# Altium PCB test.PcbDoc
Units mm, origin at the board's own origin, x right, y up, seen from the top; angles counter-clockwise.
Board outline 29.72 x 23.62 mm, 2 copper layers (Top Layer, Bottom Layer); 13 components, 30 nets, 72 pads, 6 vias.
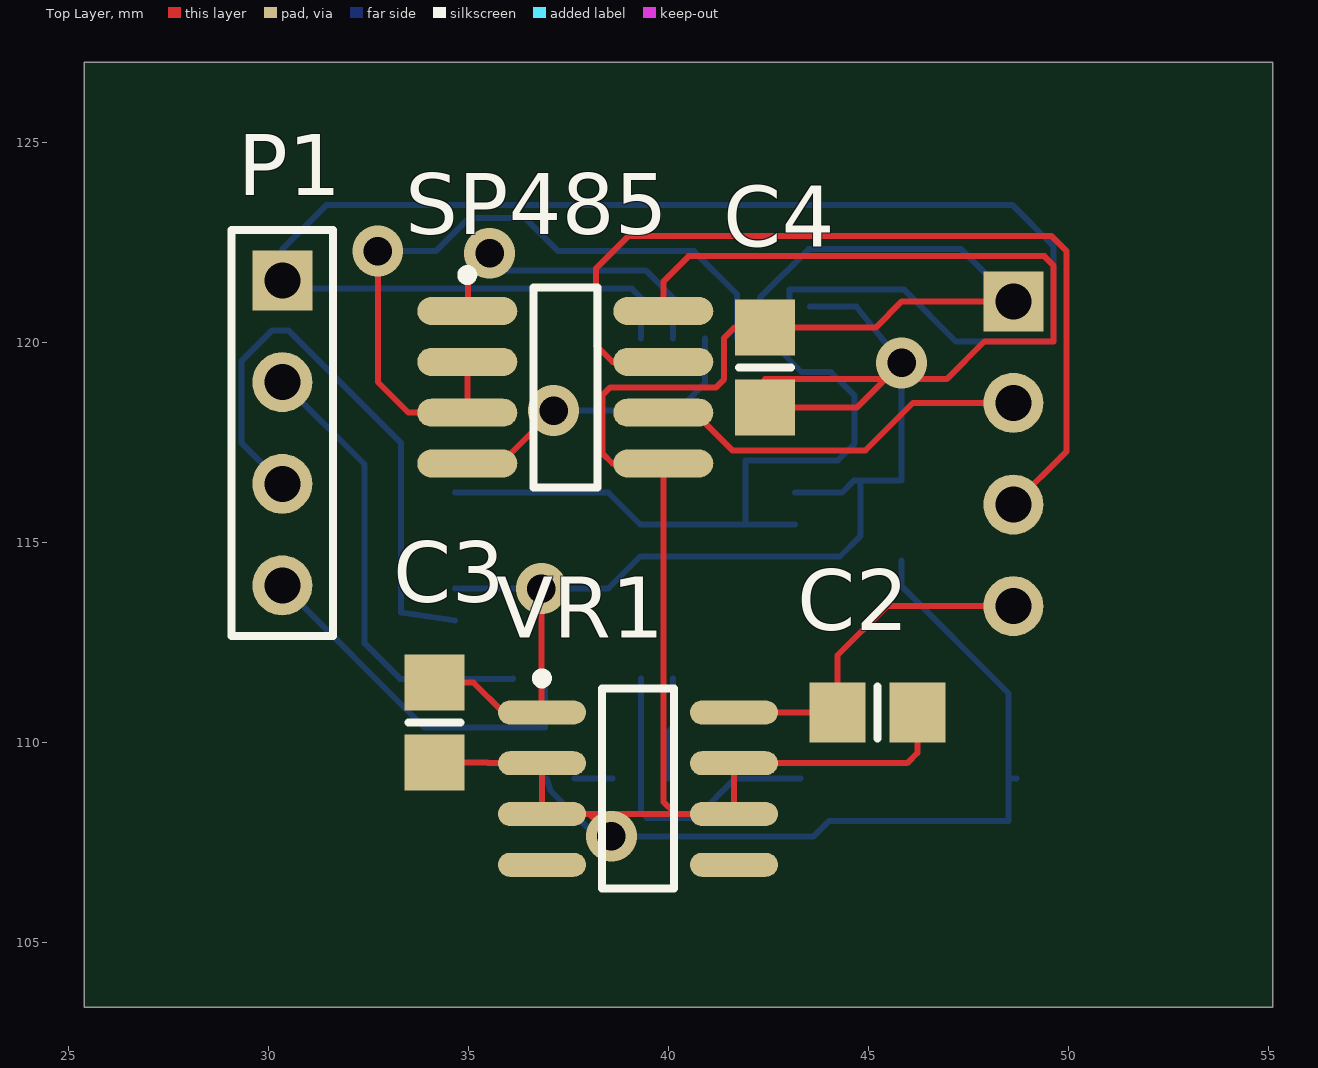
[diagram p0: Top Layer view]
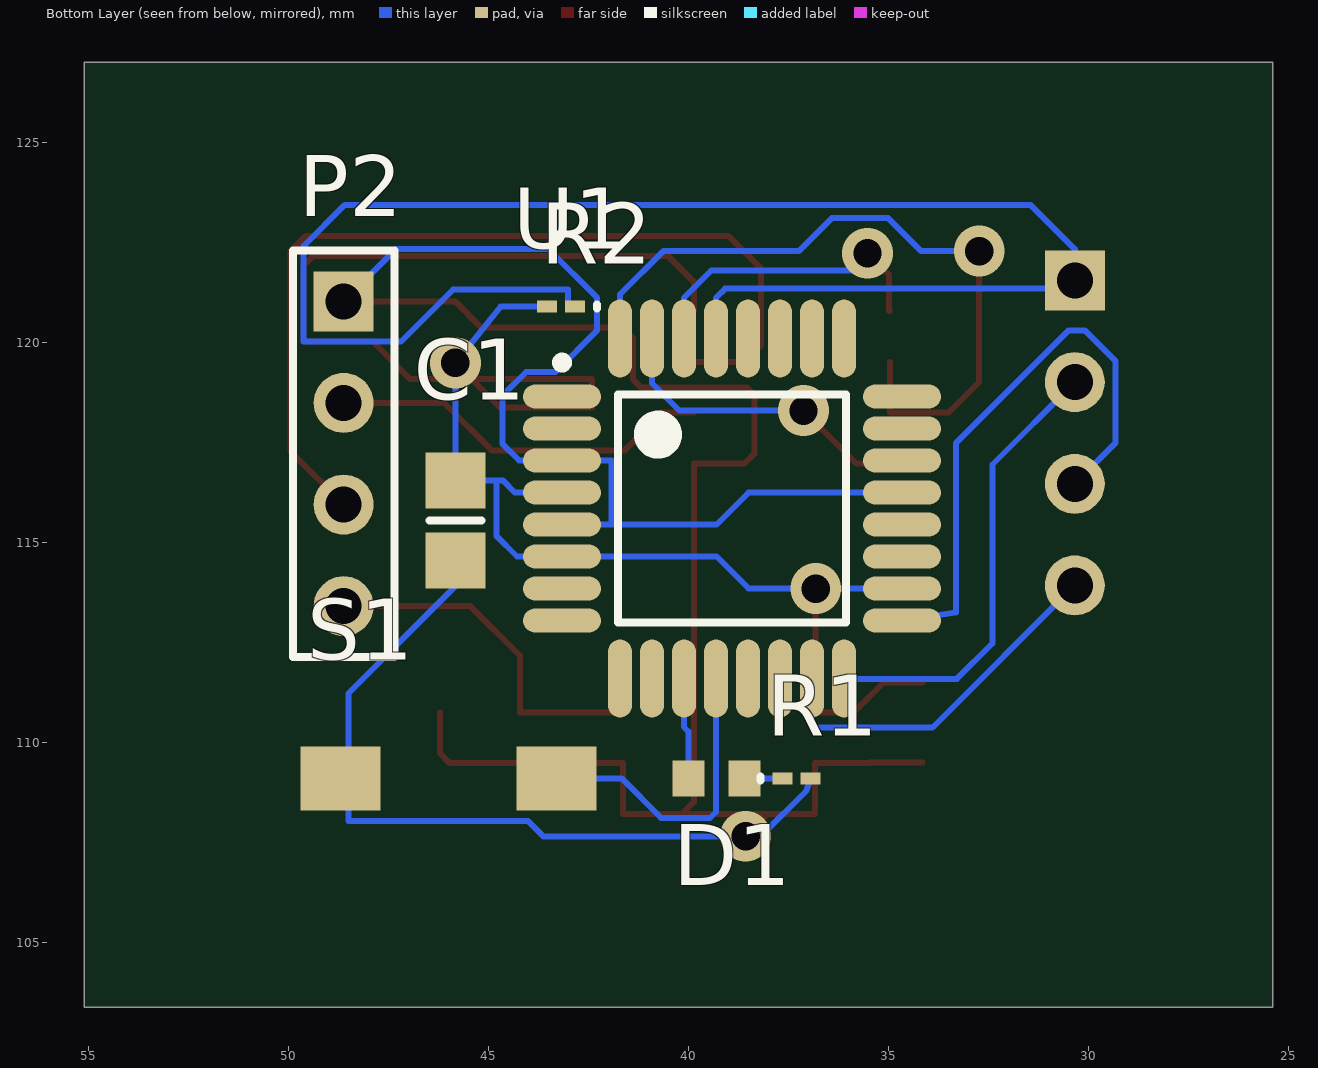
[diagram p1: Bottom Layer view, seen from below]

## Layer stack, top to bottom
Top Solder: solder mask 0.0102, Solder Resist, Dk 3.5
Top Layer: signal copper 0.0356
Dielectric 1: dielectric 0.32, FR-4, Dk 4.8
Bottom Layer: signal copper 0.0356
Bottom Solder: solder mask 0.0102, Solder Resist, Dk 3.5

## Board outline
25.4,103.378 55.118,103.378 55.118,127 25.4,127

## Design rules (kind name [scope] priority, off if disabled: settings)
Clearance [All] p1: gap=0.175
PolygonConnect [All] p1: connectstyle=Relief reliefconductorwidth=0.254 reliefentries=4 polygonreliefangle="90 Angle" airgapwidth=0.254
RoomDefinition U_sensor_specific [InComponentClass('U_sensor_specific')] p1: confinementstyle=ConfineIn formatcopy=TRUE lockcomponents=FALSE outline 25.389,103.367 56.377,103.367 56.377,126.989 25.389,126.989
RoomDefinition U_general_Interface [InComponentClass('U_general_Interface')] p2: confinementstyle=ConfineIn formatcopy=TRUE lockcomponents=FALSE outline 25.273,103.505 56.769,103.505 56.769,127.127 25.273,127.127
RoutingVias [All] p1: holewidth=0.711 width=1.27 viastyle="Through Hole" minholewidth=0.711 minwidth=1.27 maxholewidth=0.711 maxwidth=1.27
SolderMaskExpansion [All] p1: expansion=0.102
Width [All] p1: maxlimit=0.254 minlimit=0.15 preferedwidth=0.15
30 further rules are at their usual default settings.

## Classes and differential pairs
component class U_sensor_specific: P1 P2
component class U_general_Interface: C1 C2 C3 C4 D1 R1 R2 S1 SP485 U1 VR1

## Components (designator, comment, footprint, x,y, rotation, side; value= is the part's Value field where it differs from the comment)
C1 "" 6-0805_M 45.836,115.543 r270 bottom
C2 "Cap2" 6-0805_M 45.228,110.744 r0 top
C3 "Cap2" 6-0805_M 34.163,110.49 r270 top
C4 "Cap2" 6-0805_M 42.418,119.364 r90 top
D1 "LED0" 1608[0603] 39.308,109.093 r180 bottom
P1 "Header 4" HDR1X4 30.353,121.539 r270 top
P2 "Header 4" HDR1X4 48.63,121.02 r270 bottom
R1 "Res1" 0603 37.307,109.093 r180 bottom
R2 "" 0603 43.2,120.893 r0 bottom
S1 "SW-PB" ADTSM3 42.207,109.993 r0 bottom
SP485 "SP485" SO8_M 37.428,118.872 r0 top
U1 "ATmega328P-AU" 32A_M 38.921,115.84 r180 bottom
VR1 "L78L05ACD" SO8_N 39.243,108.839 r0 top

## Footprints (in the part's own frame and the unit in brackets; to place one, negate y for a bottom-side part, rotate by r counter-clockwise, add the part's x,y. Pads: shape width x height; smd on the part's side, far side on the other; paste and mask are expansions set on the pad)
6-0805_M [mm] "Chip Resistor, Body 2.0x1.2mm, IPC Low Density"
  rect 1.4x1.5 smd: 1(-1,0) 2(1,0)
  silkscreen extent 0,-0.65 0,0.65, body extent -1.07,-0.7 1.07,0.7, height 0.7
32A_M [mm] "Thin QFP, 32-Leads, Body 7x7mm, Pitch 0.8mm, IPC Low Density"
  oval 1.95x0.6 smd: 1(-4.25,2.8) 2(-4.25,2) 3(-4.25,1.2) 4(-4.25,0.4) 5(-4.25,-0.4) 6(-4.25,-1.2) 7(-4.25,-2) 8(-4.25,-2.8) 17(4.25,-2.8) 18(4.25,-2) 19(4.25,-1.2) 20(4.25,-0.4) 21(4.25,0.4) 22(4.25,1.2) 23(4.25,2) 24(4.25,2.8)
  oval 0.6x1.95 smd: 9(-2.8,-4.25) 10(-2,-4.25) 11(-1.2,-4.25) 12(-0.4,-4.25) 13(0.4,-4.25) 14(1.2,-4.25) 15(2,-4.25) 16(2.8,-4.25) 25(2.8,4.25) 26(2,4.25) 27(1.2,4.25) 28(0.4,4.25) 29(-0.4,4.25) 30(-1.2,4.25) 31(-2,4.25) 32(-2.8,4.25)
  silkscreen extent -4.38,-2.85 2.85,3.77, body extent -3.5,-3.5 3.5,3.5, height 1.2
0603 [mm] "Chip Inductor, Body 0.6x0.3mm, IPC High Density"
  rect 0.5x0.3 smd: 1(-0.35,0) 2(0.35,0)
  silkscreen extent -0.9,-0.05 -0.9,0.05, body extent -0.33,-0.18 0.33,0.18, height 0.55
1608[0603] [mm] "Chip Capacitor, Body 1.6x0.8mm, IPC High Density"
  rect 0.8x0.9 smd: 1(-0.7,0) 2(0.7,0)
  body extent -0.87,-0.48 0.87,0.48, height 1.3
ADTSM3 [mm]
  rect 2x1.6 smd: 1(1.1,0.9) 2(6.5,0.9)
  body extent 1,-1.3 6.6,3.1, height 4
HDR1X4 [mm] "Connector; Header; 4 Position"
  rect 1.5x1.5 hole 0.9: 1(0,0)
  round 1.5 hole 0.9: 2(2.54,0) 3(5.08,0) 4(7.62,0)
  silkscreen extent -1.27,-1.27 8.89,1.27
SO8_M [mm] "SOIC, 8-Leads, Body 4.9x3.9mm, Pitch 1.27mm, IPC Low Density"
  oval 2.5x0.7 smd: 1(-2.45,1.905) 2(-2.45,0.635) 3(-2.45,-0.635) 4(-2.45,-1.905) 5(2.45,-1.905) 6(2.45,-0.635) 7(2.45,0.635) 8(2.45,1.905)
  silkscreen extent -2.57,-2.5 0.8,2.93, body extent -2,-2.5 2,2.5, height 1.75
SO8_N [mm] "SOIC, 8-Leads, Body 4.9x3.9mm, Pitch 1.27mm, IPC Medium Density"
  oval 2.2x0.6 smd: 1(-2.4,1.905) 2(-2.4,0.635) 3(-2.4,-0.635) 4(-2.4,-1.905) 5(2.4,-1.905) 6(2.4,-0.635) 7(2.4,0.635) 8(2.4,1.905)
  silkscreen extent -2.52,-2.5 0.9,2.88, body extent -1.95,-2.45 1.95,2.45, height 1.75

## Part data
C1: library part Cap2, "Capacitor"
C2 C3 C4: "Capacitor"
D1: "Typical INFRARED GaAs LED"
P1 P2: "Header, 4-Pin"
R1: "Resistor"
R2: library part Res1, "Resistor"
S1: "Switch"
SP485: "SN75176"
U1: "8-bit AVR Microcontroller, 32KB Flash, 1KB EEPROM, 2KB SRAM, 32-pin TQFP, Industrial Grade (-40°C to 85°C)"
VR1: "Positive Voltage Regulator"

## Via types
v1: diameter 1.27, hole 0.711, Top Layer to Bottom Layer, 6 vias

## Nets (pads, with @x,y where several pads share a name; then routed paths per layer and width w, separated by ;. In a path a pad name is that pad's centre, name@x,y a point inside that pad or via, vN(x,y) a via of type N, cw(c..) or ccw(c..) an arc to the next point about the centre after c; other vN are vias at no path point)
+5V: C1.1 C3.1 C4.1 R2.2 SP485.8 U1.4 U1.6 U1.18 VR1.1 | length 51.8
  Top Layer w0.15: C3.1 35.128,111.49 35.874,110.744 VR1.1@36.83,110.744 ; v1(36.83,113.84) VR1.1@36.83,110.744 ; VR1.1 VR1.1@36.83,110.744 ; SP485.8 39.878,121.514 40.513,122.149 49.403,122.149 49.632,121.92 49.632,120.015 47.904,120.015 46.965,119.075 v1@45.43,119.075 ; v1(45.836,119.482) v1@45.43,119.075 ; v1@45.43,119.075 42.418,119.075 C4.1 44.718,118.364 v1@45.43,119.075
  Bottom Layer w0.15: U1.18 v1(36.83,113.84) 38.506,113.84 39.306,114.64 U1.6 44.298,114.64 44.806,115.148 44.806,116.543 ; U1.4 44.348,116.24 44.651,116.543 44.806,116.543 ; R2.2 44.704,120.893 v1(45.836,119.482) C1.1 44.806,116.543
GND: C1.2 C2.2 C3.2 C4.2 P2.1 R1.2 S1.2 SP485.5 U1.3 U1.5 U1.21 VR1.2 VR1.3 VR1.6 VR1.7 | length 86.3
  Top Layer w0.15: C3.2 35.484,109.49 35.5,109.474 VR1.2 VR1.3 38.024,108.204 ; v1(38.583,107.645) 38.024,108.204 ; C2.2 46.228,109.728 45.974,109.474 VR1.7 VR1.6 40.183,108.204 ; P2.1 45.843,121.02 45.187,120.364 C4.2 41.656,120.364 41.402,120.11 41.402,119.075 41.199,118.872 38.557,118.872 38.354,118.669 38.354,117.221 38.608,116.967 SP485.5 39.878,108.509 40.183,108.204 ; 38.024,108.204 40.183,108.204
  Bottom Layer w0.15: U1.21 38.506,116.24 39.306,115.44 41.935,115.44 ; R1.2 37.059,108.788 38.202,107.645 v1(38.583,107.645) 43.637,107.645 44.018,108.026 48.514,108.026 S1.2@48.514,109.093 ; U1.5 41.935,115.44 ; C1.2 45.836,113.894 48.514,111.216 S1.2@48.514,109.093 ; P2.1 47.324,122.326 43.51,122.326 42.291,121.107 42.291,120.294 43.332,119.253 44.069,119.253 44.653,118.669 44.653,117.45 44.244,117.04 U1.3 41.935,117.04 41.935,115.44 ; S1.2 S1.2@48.514,109.093
NetD1_1: D1.1 U1.11 | length 2.5
  Bottom Layer w0.15: D1.1 40.008,110.261 40.121,110.374 U1.11
NetD1_2: D1.2 R1.1 | length 1
  Bottom Layer w0.15: R1.1 D1.2
NetP1_1: P1.1 R2.1 U1.29 | length 41.4
  Bottom Layer w0.15: U1.29 39.321,121.107 39.092,121.336 30.353,121.336 P1.1 30.353,122.326 31.461,123.435 48.599,123.435 49.632,122.403 49.632,120.015 47.193,120.015 45.898,121.31 43.028,121.31 43.028,120.893 R2.1
NetP1_2: P1.2 U1.16 | length 11.5
  Bottom Layer w0.15: P1.2 32.41,116.942 32.41,112.471 33.299,111.582 36.121,111.582 U1.16
NetP1_3: P1.3 U1.17 | length 14.6
  Bottom Layer w0.15: P1.3 29.337,117.475 29.337,119.532 30.099,120.294 30.505,120.294 33.325,117.475 33.325,113.243 U1.17
NetP1_4: P1.4 U1.15 | length 9.3
  Bottom Layer w0.15: P1.4 33.909,110.363 36.921,110.363 U1.15
NetP2_2: P2.2 SP485.6 | length 9.6
  Top Layer w0.15: SP485.6 40.665,118.237 41.605,117.297 44.933,117.297 46.115,118.48 P2.2
NetP2_3: P2.3 SP485.7 | length 22.9
  Top Layer w0.15: SP485.7 38.608,119.507 38.202,119.913 38.202,121.844 39.014,122.657 49.581,122.657 49.962,122.276 49.962,117.272 P2.3
NetS1_1: S1.1 U1.12 | length 7.8
  Bottom Layer w0.15: U1.12 39.321,108.253 39.472,108.102 40.691,108.102 41.681,109.093 S1.1
NetSP485_1: SP485.1 U1.30 | length 7.9
  Top Layer w0.15: SP485.1 35.001,120.777 35.001,121.691 v1(35.535,122.225)
  Bottom Layer w0.15: v1(35.535,122.225) 35.535,122.022 35.763,121.793 39.435,121.793 40.121,121.107 U1.30
NetSP485_2: SP485.2 SP485.3 U1.32 | length 18.3
  Top Layer w0.15: v1(32.741,122.276) 32.741,119.004 33.508,118.237 SP485.3 SP485.2
  Bottom Layer w0.15: v1(32.741,122.276) 34.192,122.276 35.027,123.11 36.42,123.11 37.254,122.276 40.64,122.276 41.721,121.195 U1.32
NetSP485_4: SP485.4 U1.31 | length 7.9
  Top Layer w0.15: SP485.4 35.814,116.967 v1(37.135,118.288)
  Bottom Layer w0.15: v1(37.135,118.288) 40.234,118.288 40.921,118.975 U1.31
NetU1_1: U1.1
NetU1_2: U1.2
NetU1_9: U1.9
NetU1_10: U1.10
NetU1_13: U1.13
NetU1_14: U1.14
NetU1_19: U1.19
NetU1_20: U1.20
NetU1_22: U1.22
NetU1_23: U1.23
NetU1_24: U1.24
NetU1_25: U1.25
NetU1_26: U1.26
NetU1_27: U1.27
NetU1_28: U1.28
VCC: C2.1 P2.4 VR1.8 | length 8.9
  Top Layer w0.15: VR1.8 C2.1 44.228,112.166 45.462,113.4 P2.4
pads on no net: U1.7 U1.8 VR1.4 VR1.5